# Altium PCB PCB_RegThermique.PcbDoc
Units mm, origin at the board's own origin, x right, y up, seen from the top; angles counter-clockwise.
Board outline 154.95 x 94.96 mm, 2 copper layers (Top Layer, Bottom Layer), stack 1.586 mm thick; 119 components, 73 nets, 345 pads, 146 vias.
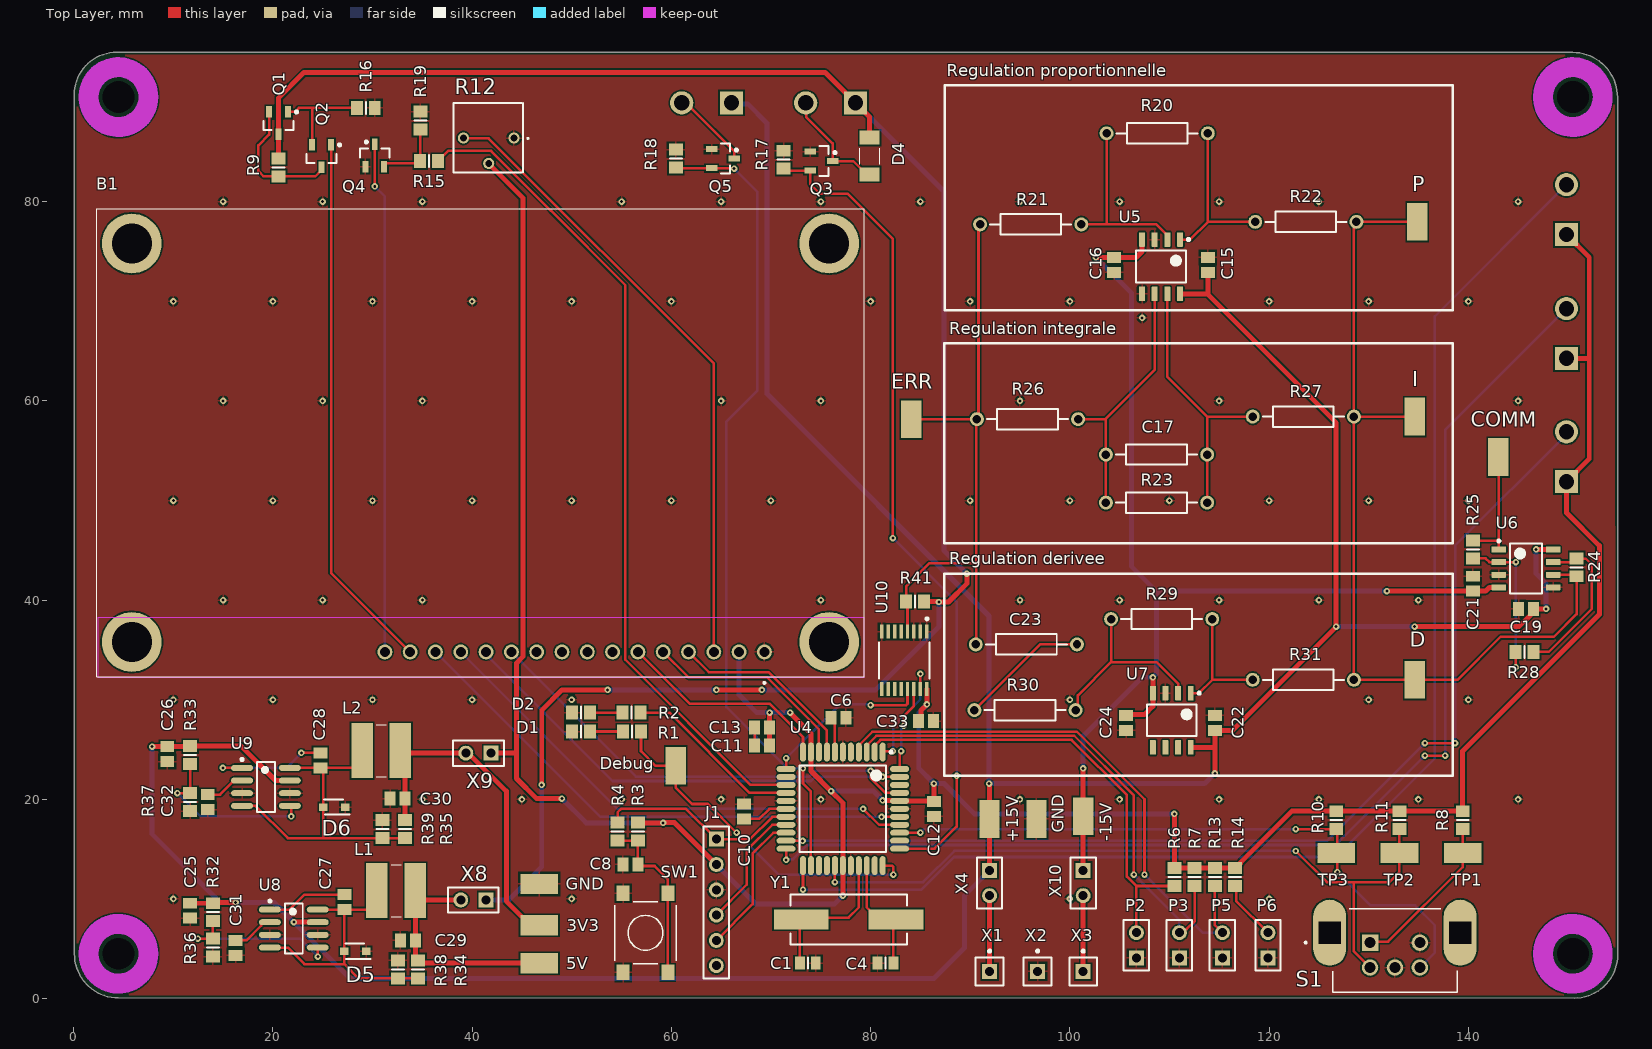
[diagram p0: Top Layer view]
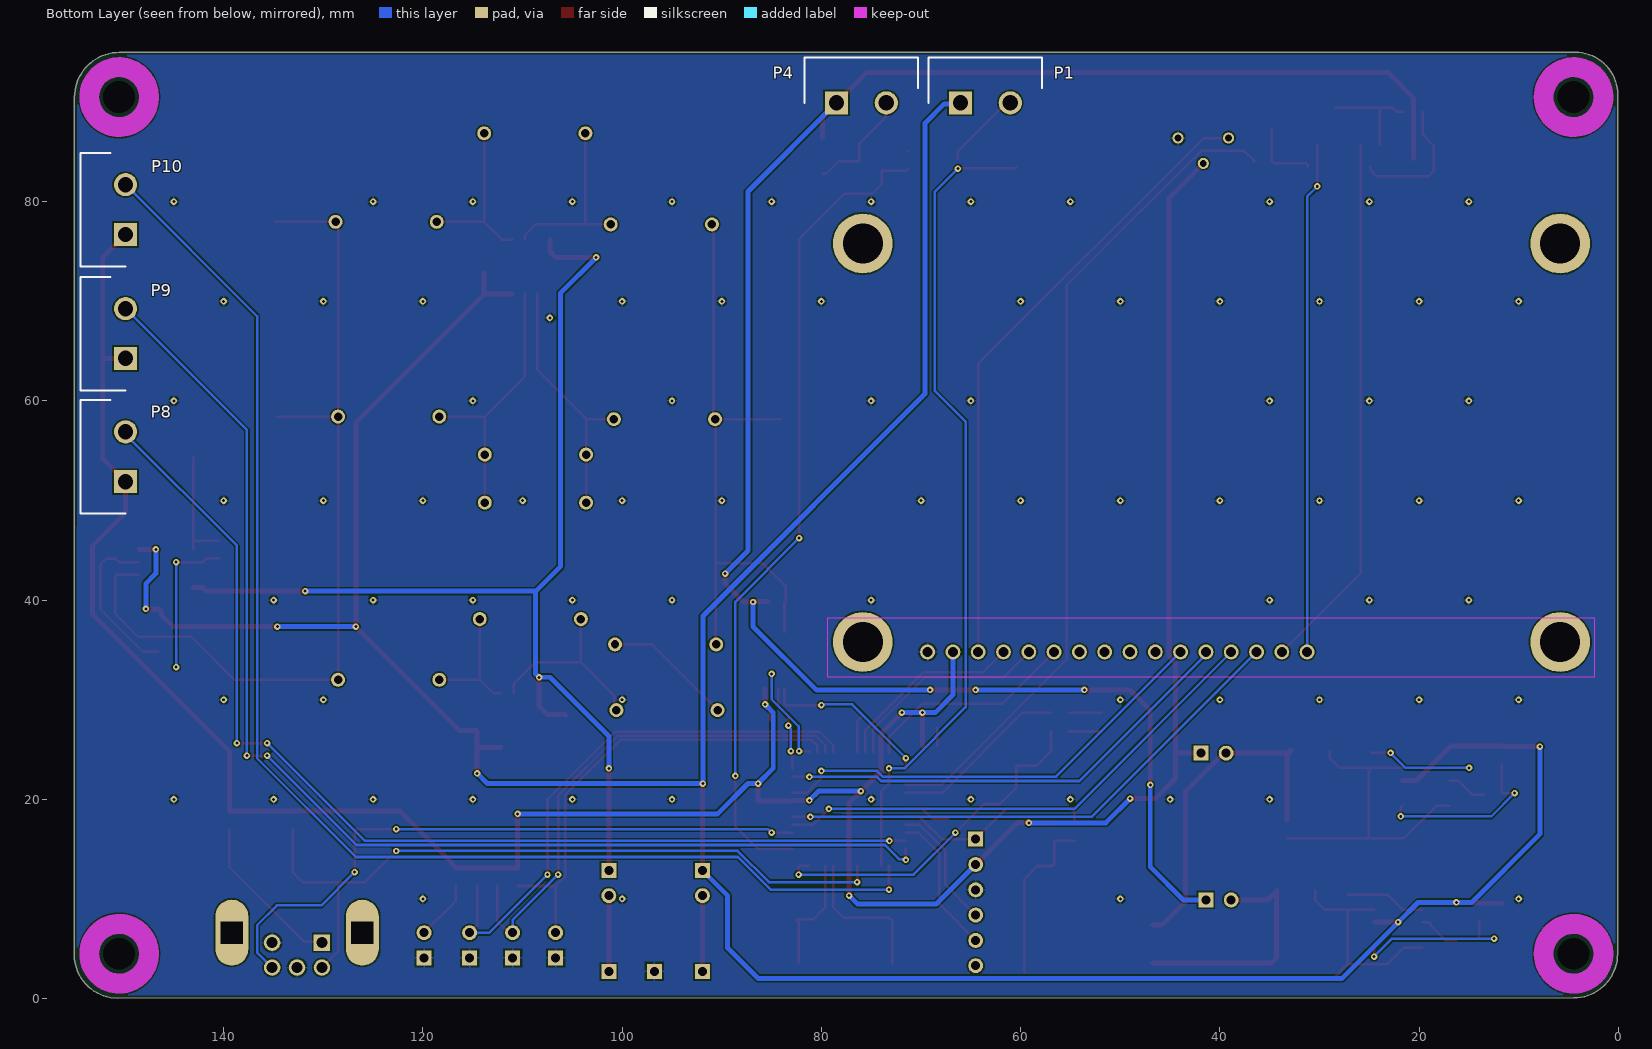
[diagram p1: Bottom Layer view, seen from below]

## Layer stack, top to bottom
Top Solder: solder mask 0.0102, Solder Resist, Dk 3.5
Top Layer: signal copper 0.018
Dielectric1: core 1.55, FR-4, Dk 4.8
Bottom Layer: signal copper 0.018
Bottom Solder: solder mask 0.0102, Solder Resist, Dk 3.5

## Board outline
0.072,4.497 0.056,90.729 cw(c4.332,90.729) 4.332,95.004 150.482,94.984 cw(c150.482,90.482) 154.984,90.482 155.011,4.423 cw(c150.633,4.423) 150.633,0.045 4.498,0.072 cw(c4.498,4.497)

## Design rules (kind name [scope] priority, off if disabled: settings)
BoardOutlineClearance [All] p1: gap=0.25 ignorepadtopadclearanceinfootprint=FALSE except(0: Arc-SplitContinuation Track-SplitContinuation SMDPad-SplitContinuation THPad-SplitContinuation Via-SplitContinuation Fill-SplitContinuation Poly-SplitContinuation Region-SplitContinuation Text-SplitContinuation)
Clearance Clearance-xPP-xTP-xTT [All] p1: gap=0.151 ignorepadtopadclearanceinfootprint=TRUE
ComponentClearance [All] p1: gap=0.25 collisioncheckmode=3 verticalgap=0.25 showdistances=FALSE
DiffPairsRouting [All] p1: maxlimit=0.25 minlimit=0.25 mostfreqgap=0.25 toplayer_minwidth=0.381 toplayer_maxwidth=0.381 toplayer_prefwidth=0.381 bottomlayer_minwidth=0.381 bottomlayer_maxwidth=0.381 bottomlayer_prefwidth=0.381 maxuncoupledlength=12.5
Height [All] p1: minheight=0 maxheight=25 prefheight=12.5
HoleSize HoleSize-PTH [All] p1: absolutevalues=TRUE maxlimit=10 minlimit=0.25 maxpercent=80.000 minpercent=20.000
HoleToHoleClearance [All] p1: gap=0.35 allowstackedmicrovias=TRUE
MinimumAnnularRing "Minimum IAR  >0.45mm" [((ObjectKind = 'Pad') OR (ObjectKind = 'Via')) And (Layer = 'MultiLayer') And (HoleDiameter > AsMM(0.45))] p1: minimumring=0.175 // minimum inner annular ring for pads > 0.45mm finished hole size
MinimumAnnularRing "Minimum IAR <=0.45mm" [((ObjectKind = 'Pad') OR (ObjectKind = 'Via')) And (Layer = 'MultiLayer') And (HoleDiameter <= AsMM(0.45))] p2: minimumring=0.175 // minimum inner annular ring for pads <= 0.45mm finished hole size
MinimumSolderMaskSliver [All] p1: minsoldermaskwidth=0.08
PasteMaskExpansion [All] p1: expansion=-0.025
PlaneClearance PlaneClearance-IPI [All] p1: clearance=0.25
PlaneConnect [All] p1: planeconnectstyle=Relief reliefexpansion=0.175 reliefentries=4 reliefconductorwidth=0.2 reliefairgap=0.2
PolygonConnect PolygonConnect-xTW [All] p1: connectstyle=Relief reliefconductorwidth=0.2 reliefentries=4 polygonreliefangle="90 Angle" airgapwidth=0.2
RoutingCorners [All] p1: cornerstyle=45-Degree minsetback=2.5 maxsetback=5
RoutingVias RoutingViasES [All] p1: holewidth=0.3 width=0.65 viastyle="Through Hole" minholewidth=0.25 minwidth=0.61 maxholewidth=0.45 maxwidth=0.8 // finishet hole size <= 0.45mm
SilkToSilkClearance [All] p1: silktosilkclearance=0.2
SilkToSolderMaskClearance SilkscreenOverComponentPads [IsPad] p1: minsilkscreentomaskgap=0.2 clearancetoexposedcopper=TRUE
SolderMaskExpansion [All] p1: expansion=0 istentingtop=FALSE
UnRoutedNet [All] p1: checkbadconnections=TRUE
Width Width-xTW [InNetClass('POWER')] p1: maxlimit=1.5 minlimit=0.5 preferedwidth=0.5 minimp=50.000000 maximp=50.000000 favimp=50.000000
17 further rules are at their usual default settings.

## Classes and differential pairs
component class uC_HMI: B1 C1 C4 C6 C8 C10 C11 C12 C13 D1 D2 D4 Debug1 GND1 J1 P1 P2 P3 P4 P5 P6 P8 P9 P10 Q1 Q2 Q3 Q4 Q5 R1 R2 R3 R4 R6 R7 R8 R9 R10 R11 R12 R13 R14 R15 R16 R17 R18 R19 S1 SW1 TP1 TP2 TP3 U4 Y1
component class Regulation_PID: C15 C16 C17 C19 C21 C22 C23 C24 R20 R21 R22 R23 R24 R25 R26 R27 R28 R29 R30 R31 "REG D1" "REG I1" "REG P1" REG_COMM1 REG_ERR1 U5 U6 U7
component class Alimentation: 3V3 5V +15V -15V C25 C26 C27 C28 C29 C30 C31 C32 C33 D5 D6 GND1 L1 L2 R32 R33 R34 R35 R36 R37 R38 R39 R41 U8 U9 U10 X1 X2 X3 X4 X8 X9 X10

## Components (designator, comment, footprint, x,y, rotation, side; value= is the part's Value field where it differs from the comment)
3V3 "REGP" KSTN-5019_V 46.736,7.366 r180 top
5V "REGP" KSTN-5019_V 46.736,3.556 r0 top
+15V "REGP" KSTN-5019_V 91.948,18.034 r270 top
-15V "REGP" KSTN-5019_V 101.346,18.3 r270 top
B1 "NHD-0420AZ-FSW-GBW-33V3" NHD0420AZFSWGBW33V3 69.342,34.798 r180 top
C1 "22pF, 10V" 6-0805_L 73.698,3.556 r180 top value=22pF
C4 "22pF, 10V" 6-0805_L 81.496,3.556 r0 top value=22pF
C6 "Cap" C0805 76.782,28.194 r180 top value=100pF
C8 "100nF, 50V" C0805 55.88,13.462 r180 top
C10 "Cap" C0805 67.31,18.784 r270 top value=0.1uF
C11 "Cap" C0805 69.1,25.4 r180 top value=0.1uF
C12 "Cap" C0805 86.36,19.05 r270 top value=0.1uF
C13 "Cap" C0805 69.1,27.236 r180 top value=0.1uF
C15 "Cap" C0805 113.854,73.66 r270 top value=100nF
C16 "Cap" C0805 104.456,73.648 r90 top value=100nF
C17 "Cap" AXIAL-0.4 108.712,54.61 r180 top value=100pF
C19 "Cap" C0805 145.796,39.116 r0 top value=100nF
C21 "Cap" C0805 140.462,41.646 r270 top value=100nF
C22 "Cap" C0805 114.554,27.686 r270 top value=100nF
C23 "Cap" AXIAL-0.4 95.642,35.56 r180 top value=100pF
C24 "Cap" C0805 105.664,27.686 r90 top value=100nF
C25 "Cap Pol1" C0805 11.684,8.821 r270 top value=47uF
C26 "Cap Pol1" C0805 9.398,24.545 r270 top value=47uF
C27 "Cap" C0805 27.178,9.686 r270 top value=0.1uF
C28 "Cap" C0805 24.769,23.91 r270 top value=0.1uF
C29 "Cap Pol1" C0805 33.556,5.842 r180 top value=33uF
C30 "Cap Pol1" C0805 32.524,20.066 r180 top value=33uF
C31 "Cap" C0805 16.256,5.092 r270 top value=0.1uF
C32 "Cap" C0805 13.462,19.731 r270 top value=0.1uF
C33 "Cap" C0805 85.56,27.845 r180 top value=0.047u
COMM "REGP" KSTN-5019_V 143.002,54.356 r90 top (schematic designator REG_COMM1)
D "REGP" KSTN-5019_V 134.62,32.004 r90 top (schematic designator "REG D1")
D1 "Super Red, 1.9 V" 6-0805_N 50.938,26.812 r0 top
D2 "Bright Green, 2 V" 6-0805_N 50.938,28.702 r0 top
D4 "1N4007" JAN1N4108CUR1 79.906,84.582 r90 top
D5 "50SQ100" SODFL2513X70N 28.278,4.745 r180 top
D6 "50SQ100" SODFL2513X70N 26.162,19.223 r180 top
Debug "LedDebugg" KSTN-5019_V 60.452,23.368 r270 top (schematic designator Debug1)
ERR "REGP" KSTN-5019_V 84.074,58.166 r90 top (schematic designator REG_ERR1)
GND "REGP" KSTN-5019_V 96.645,18.034 r90 top
GND "PEC12" KSTN-5019_V 46.736,11.511 r0 top
I "REGP" KSTN-5019_V 134.62,58.42 r90 top (schematic designator "REG I1")
J1 "61300611121" HDR1X6 64.516,16.002 r270 top
L1 "Inductor" SDE0604A101K 32.365,10.841 r0 top value=220uH
L2 "Inductor" SDE0604A101K 30.881,24.892 r0 top value=220uH
P "REGP" KSTN-5019_V 134.874,77.978 r90 top (schematic designator "REG P1")
P1 "R_Dissipator" RHDRRA2W95P0X500_1X2_1120X900X1280P 66.04,89.916 r180 bottom
P2 "Alim 0-30 IN" HDR1X2 106.68,4.076 r90 top
P3 "Alim 0-30 IN" HDR1X2 110.998,4.076 r90 top
P4 "FAN_Control" RHDRRA2W95P0X500_1X2_1120X900X1280P 78.486,89.916 r180 bottom
P5 "Alim 0-30 IN" HDR1X2 115.316,4.076 r90 top
P6 "Alim 0-30 IN" HDR1X2 119.888,4.076 r90 top
P8 "R_Dissipator" RHDRRA2W95P0X500_1X2_1120X900X1280P 149.86,51.896 r90 bottom
P9 "R_Dissipator" RHDRRA2W95P0X500_1X2_1120X900X1280P 149.86,64.262 r90 bottom
P10 "R_Dissipator" RHDRRA2W95P0X500_1X2_1120X900X1280P 149.86,76.708 r90 bottom
Q1 "PNP" SOT-23B_N 20.574,87.884 r270 top
Q2 "PNP" SOT-23B_N 24.892,84.582 r270 top
Q3 "MOSFET-N" SOT23_N 75.075,84.074 r0 top
Q4 "MOSFET-N" SOT23_N 30.226,84.647 r90 top
Q5 "MOSFET-N" SOT23_N 65.169,84.328 r0 top
R1 "270R" 6-0805_N 56.054,26.812 r0 top
R2 "270R" 6-0805_N 56.018,28.702 r0 top
R3 "10k" 6-0805_N 56.642,16.764 r90 top
R4 "1k" 6-0805_N 54.61,16.764 r90 top
R6 "Res2" 6-0805_N 110.49,12.204 r90 top value=10K
R7 "Res2" 6-0805_N 112.522,12.204 r90 top value=10K
R8 "10k" 6-0805_N 139.446,17.908 r90 top
R9 "Res2" 6-0805_N 20.574,83.45 r270 top value=33
R10 "10k" 6-0805_N 126.746,17.908 r90 top
R11 "10k" 6-0805_N 133.096,17.908 r90 top
R12 "RPot" 3362P_1 41.664,89.916 r180 top value=10k
R13 "Res2" 6-0805_N 114.554,12.204 r90 top value=10K
R14 "Res2" 6-0805_N 116.586,12.204 r90 top value=10K
R15 "Res2" 6-0805_N 35.676,84.074 r180 top value=200
R16 "Res2" 6-0805_N 29.326,89.408 r0 top value=1k8
R17 "Res2" 6-0805_N 71.27,84.212 r270 top value=10k
R18 "Res2" 6-0805_N 60.452,84.328 r270 top value=10k
R19 "Res2" 6-0805_N 34.798,88.138 r270 top value=100k
R20 "Res2" AXIAL-0.4 108.774,86.868 r0 top value=-
R21 "Res2" AXIAL-0.4 96.074,77.724 r0 top value=-
R22 "10k" AXIAL-0.4 123.698,77.978 r0 top value=1K
R23 "Res2" AXIAL-0.4 108.712,49.784 r0 top value=1K
R24 "Res2" 6-0805_N 150.876,43.296 r90 top value=100k
R25 "Res2" 6-0805_N 140.462,45.085 r90 top value=1K
R26 "Res2" AXIAL-0.4 95.758,58.166 r0 top value=1K
R27 "10K" AXIAL-0.4 123.444,58.42 r0 top value=1K
R28 "Res2" 6-0805_N 145.658,34.798 r180 top value=1K
R29 "Res2" AXIAL-0.4 109.22,38.1 r0 top value=1K
R30 "Res2" AXIAL-0.4 95.504,28.956 r0 top value=1K
R31 "10k" AXIAL-0.4 123.444,32.004 r0 top value=1K
R32 "Res2" 6-0805_N 13.97,8.671 r90 top value=1K
R33 "Res2" 6-0805_N 11.684,24.441 r90 top value=1K
R34 "Res2" 6-0805_N 34.584,2.932 r90 top value=47k
R35 "Res2" 6-0805_N 33.274,17.018 r90 top value=24k
R36 "Res2" 6-0805_N 13.97,5.115 r90 top value=1K
R37 "Res2" 6-0805_N 11.684,19.731 r90 top value=1K
R38 "Res2" 6-0805_N 32.552,2.932 r270 top value=15k
R39 "Res2" 6-0805_N 30.988,17.018 r270 top value=15k
R41 "Res2" 6-0805_N 84.466,39.878 r0 top value=10k
S1 "PEC12R-2220F-S0024" XDCR_PEC12R-2220F-S0024 132.642,3.116 r0 top
SW1 "430182043816" 430182043816 57.404,6.604 r90 top
TP1 "REGP" KSTN-5019_V 139.446,14.606 r180 top
TP2 "REGP" KSTN-5019_V 133.096,14.606 r180 top
TP3 "REGP" KSTN-5019_V 126.746,14.606 r180 top
U4 "PIC32MX250F128D-I/PT" MCHP-TQFP-PT44_M 77.216,19.05 r270 top
U5 "TL052ACD" D0008A_N 109.155,73.475 r270 top
U6 "TL052ACD" D0008A_N 145.796,43.18 r0 top
U7 "TL052ACD" D0008A_N 110.236,27.94 r270 top
U8 "MAX5033AUSA" S8-5_N 22.098,7.031 r0 top
U9 "MAX5033AUSA" S8-5_N 19.304,21.255 r0 top
U10 "MAX7315AUE+T" FP-U16-2-MFG 83.382,33.955 r270 top
X1 "POWER" PIN1 91.948,2.713 r0 top
X2 "GROUND" PIN1 96.774,2.725 r0 top
X3 "-POWER" PIN1 101.346,2.713 r0 top
X4 "Jumper" HDR1X2 91.948,12.873 r270 top
X8 "Jumper" HDR1X2 41.402,9.906 r180 top
X9 "Jumper" HDR1X2 41.91,24.638 r180 top
X10 "Jumper" HDR1X2 101.346,12.873 r270 top
Y1 "8MHz, 12p" FOX-FOXSDLF160-20_V 77.8,7.95 r0 top value="8M, 12p"

## Footprints (in the part's own frame and the unit in brackets; to place one, negate y for a bottom-side part, rotate by r counter-clockwise, add the part's x,y. Pads: shape width x height; smd on the part's side, far side on the other; paste and mask are expansions set on the pad)
6-0805_L [mm] "Chip Resistor, Body 2.0x1.2mm, IPC High Density"
  rect 1x1.3 smd: 1(-0.8,0) 2(0.8,0)
  silkscreen extent 0,-0.55 0,0.55, body extent -1.07,-0.7 1.07,0.7, height 0.7
6-0805_N [mm] "Chip Resistor, Body 2.0x1.2mm, IPC Medium Density"
  rect 1.2x1.4 smd: 1(-0.9,0) 2(0.9,0)
  silkscreen extent 0,-0.6 0,0.6, body extent -1.07,-0.7 1.07,0.7, height 0.7
3362P_1 [mm]
  round 1.12 hole 0.69: 1(-2.54,3.53) 2(0,6.07) 3(2.54,3.53)
  silkscreen extent -3.99,0 3.56,6.99
430182043816 [mm] "6*6mm vertical type, SMD, height 4.3mm, black actuator, 160gf, T&R"
  rect 1.55x1.3 smd: 1(-3.975,2.25) 2(-3.975,-2.25) 3(3.975,2.25) 4(3.975,-2.25)
  silkscreen extent -3.1,-3.1 3.1,3.1, body extent -4.5,-3.1 4.5,3.1, height 4.29
AXIAL-0.4 [mm] "Axial Device, Thru-Hole; 2 Leads; 0.4 in Pin Spacing"
  round 1.4 hole 0.85: 1(-5.08,0) 2(5.08,0)
  silkscreen extent -4.06,-1.02 4.06,1.02
C0805 [mm] "Chip Capacitor, Body 2.0x1.3mm, IPC High Density"
  rect 1.1x1.4 smd: 1(-0.75,0) 2(0.75,0)
  body extent -1.1,-0.72 1.1,0.72, height 1.4
D0008A_N [mm] "SOIC, 8-Leads, Body 5x4mm, Pitch 1.27mm, IPC Medium Density"
  rrect17% 1.45x0.6 smd: 1(-2.725,1.905) 2(-2.725,0.635) 3(-2.725,-0.635) 4(-2.725,-1.905) 5(2.725,-1.905) 6(2.725,-0.635) 7(2.725,0.635) 8(2.725,1.905)
  silkscreen extent -2.85,-2.5 1.6,2.88, body extent -3,-2.45 3,2.45, height 1.63
FOX-FOXSDLF160-20_V [mm] "SMD, 2-Leads, Body 5x11.7mm, Height 4.5mm"
  rect 5.5x2 smd: 1(-4.75,0) 2(4.75,0)
  silkscreen extent -5.85,-2.5 5.85,2.5, body extent -5.85,-2.5 5.85,2.5, height 4.5
FP-U16-2-MFG [mm]
  rect 1.4x0.35 smd paste+0 mask+0: 1(-2.875,2.275) 2(-2.875,1.625) 3(-2.875,0.975) 4(-2.875,0.325) 5(-2.875,-0.325) 6(-2.875,-0.975) 7(-2.875,-1.625) 8(-2.875,-2.275) 9(2.875,-2.275) 10(2.875,-1.625) 11(2.875,-0.975) 12(2.875,-0.325) 13(2.875,0.325) 14(2.875,0.975) 15(2.875,1.625) 16(2.875,2.275)
  silkscreen extent -4.3,-2.55 1.8,2.55, body extent -3.2,-2.5 3.2,2.5, height 1.1
HDR1X2 [mm] "Connector; Header; 2 Position"
  rect 1.5x1.5 hole 0.9: 1(0,0)
  round 1.5 hole 0.9: 2(2.54,0)
  silkscreen extent -1.27,-1.27 3.81,1.27
HDR1X6 [mm] "Connector; Header; 6 Position"
  rect 1.5x1.5 hole 0.9: 1(0,0)
  round 1.5 hole 0.9: 2(2.54,0) 3(5.08,0) 4(7.62,0) 5(10.16,0) 6(12.7,0)
  silkscreen extent -1.27,-1.27 13.97,1.27
JAN1N4108CUR1 [mm]
  rect 1.4x2.03 smd: 1(-1.84,0) 2(1.84,0)
  silkscreen extent -0.8,-1 0.8,1
KSTN-5019_V [mm] "Test Point, 1-Leads, Body 3.81x2.03mm"
  rect 3.8x2.03 smd: 1(0,0)
  body extent -1.9,-1.01 1.9,1.02, height 2.29
MCHP-TQFP-PT44_M [mm] "QFN, 44-Leads, Body 10x10mm, Pitch 0.8mm, IPC Low Density"
  oval 1.9x0.6 smd: 1(-5.7,4) 2(-5.7,3.2) 3(-5.7,2.4) 4(-5.7,1.6) 5(-5.7,0.8) 6(-5.7,0) 7(-5.7,-0.8) 8(-5.7,-1.6) 9(-5.7,-2.4) 10(-5.7,-3.2) 11(-5.7,-4) 23(5.7,-4) 24(5.7,-3.2) 25(5.7,-2.4) 26(5.7,-1.6) 27(5.7,-0.8) 28(5.7,0) 29(5.7,0.8) 30(5.7,1.6) 31(5.7,2.4) 32(5.7,3.2) 33(5.7,4)
  oval 0.6x1.9 smd: 12(-4,-5.7) 13(-3.2,-5.7) 14(-2.4,-5.7) 15(-1.6,-5.7) 16(-0.8,-5.7) 17(0,-5.7) 18(0.8,-5.7) 19(1.6,-5.7) 20(2.4,-5.7) 21(3.2,-5.7) 22(4,-5.7) 34(4,5.7) 35(3.2,5.7) 36(2.4,5.7) 37(1.6,5.7) 38(0.8,5.7) 39(0,5.7) 40(-0.8,5.7) 41(-1.6,5.7) 42(-2.4,5.7) 43(-3.2,5.7) 44(-4,5.7)
  silkscreen extent -5.82,-4.35 4.35,4.97, body extent -5,-5 5,5, height 1.2
NHD0420AZFSWGBW33V3 [mm]
  round 1.5 hole 1: 1(0,0) 2(2.54,0) 3(5.08,0) 4(7.62,0) 5(10.16,0) 6(12.7,0) 7(15.24,0) 8(17.78,0) 9(20.32,0) 10(22.86,0) 11(25.4,0) 12(27.94,0) 13(30.48,0) 14(33.02,0) 15(35.56,0) 16(38.1,0)
  round 6 hole 4: MH1(-6.5,-1) MH2(-6.5,-41) MH3(63.5,-41) MH4(63.5,-1)
  Keep-Out Layer region: -10.033,-3.429 66.929,-3.429 66.929,2.54 -10.033,2.54
  silkscreen extent -10,-44.5 67,3.2, body extent -10,-3.38 10,3.38, height 5.8
PIN1 [mm] "Generic Antenna; 1 Lead"
  rect 1.5x1.5 hole 0.9: 1(0,0)
  silkscreen extent -1.4,-1.4 1.4,2.17
RHDRRA2W95P0X500_1X2_1120X900X1280P [mm]
  rect 2.325x2.325 / inner round 2.325 / far side rect 2.325x2.325 hole 1.55: 1(0,0)
  round 2.325 hole 1.55: 2(5,0)
  silkscreen extent -3.2,0 8.2,4.54
S8-5_N [mm] "SOIC, 8-Leads, Body 4.9x3.9mm, Pitch 1.27mm, IPC Medium Density"
  oval 2.2x0.6 smd: 1(-2.4,1.905) 2(-2.4,0.635) 3(-2.4,-0.635) 4(-2.4,-1.905) 5(2.4,-1.905) 6(2.4,-0.635) 7(2.4,0.635) 8(2.4,1.905)
  silkscreen extent -2.52,-2.5 0.9,2.88, body extent -2,-2.5 2,2.5, height 1.75
SDE0604A101K [mm]
  rect 2.15x5.5 smd: 1(-1.925,0) 2(1.925,0)
  silkscreen extent -0.5,-2.6 0.5,2.6
SODFL2513X70N [mm]
  rect 0.84x0.74 smd: 1(-1.1,0) 2(1.1,0)
  silkscreen extent -1.52,-0.76 1.01,0.76
SOT23_N [mm] "SOT23, 3-Leads, Body 2.9x1.3mm, Pitch 0.95mm, Lead Span 2.3mm - Reverse Pinning, IPC Medium Density"
  rect 1.15x0.6 smd: 1(1.125,0) 2(-1.125,-0.95) 3(-1.125,0.95)
  silkscreen extent -0.2,-1.5 1.48,1.5, body extent -0.7,-1.5 0.7,1.5, height 1.1
SOT-23B_N [mm] "SOT23, 3-Leads, Body 2.9x1.3mm, Pitch 0.95mm, Lead Span 2.4mm, IPC Medium Density"
  rect 1.15x0.6 smd: 1(-1.125,0.95) 2(-1.125,-0.95) 3(1.125,0)
  silkscreen extent -1.25,-1.5 0.7,1.93, body extent -0.7,-1.5 0.7,1.5, height 1.14
XDCR_PEC12R-2220F-S0024 [mm]
  rect 1.65x1.65 hole 1.1: 1(-2.5,2.5)
  round 1.65 hole 1.1: 2(2.5,2.5) A(-2.5,0) B(2.5,0) C(0,0)
  oval 3.316x6.632 hole 2.2 square: S1(-6.55,3.5) S2(6.55,3.5)
  silkscreen extent -9.06,-2.5 6.26,5.9, body extent -6.41,-20 6.41,2.4, height 16.7

## Part data
3V3 5V +15V -15V COMM D Debug ERR GND GND I P TP1 TP2 TP3: library part CMP-1672-00008-1, "Test Point, 1 Position SMD, RoHS, Tape and Reel", Package Quantity=1000, ComponentLink1Description="Manufacturer URL", ComponentLink1URL=http://www.keyelco.com/, ComponentLink2Description=Datasheet, ComponentLink2URL=http://www.keyelco.com/product-pdf.cfm?p=1357, Contact Plating=Silver, DatasheetVersion=03/2014, Mount="Surface Mount", Mounting Technology="Surface Mount", PackageDescription="1-Pin Surface Mount Device, Body 3.81 x 2.03 mm", PackageReference=5019, Packaging="Tape and Reel", Pins=1, RoHSCompliant=True
B1: "LCD Character Display Modules & Accessories STN- GRAY Transfl 77.5 x 47.0", Manufacturer_Name="Newhaven Display", Mouser Part Number=763-0420AZFSWGBW33V3, Datasheet Link=http://www.newhavendisplay.com/specs/NHD-0420AZ-FSW-GBW-33V3.pdf, Geometry.Height=14.5mm, Manufacturer_Part_Number=NHD-0420AZ-FSW-GBW-33V3, Mouser Price/Stock=https://www.mouser.co.uk/ProductDetail/Newhaven-Display/NHD-0420AZ-FSW-GBW-33V3?qs=G49gCGQm93jUf0i9XnwMsw%3D%3D
C1 C4: library part CMP-1036-01211-1, "CAP 22pF 10V ±10% 0805 (2012 Metric) Thickness 0.75mm SMD", Case-EIA=0805, Case-Metric=2012, Rated Voltage="10 V", Tolerance=Â±10%, Max Thickness="0.75 mm", Technology=SMT
C6 C10 C11 C12 C13 C15 C16 C17 C19 C21 C22 C23 C24 C27 C28 C31 C32 C33: "Capacitor", LatestRevisionDate=17-Jul-2002, LatestRevisionNote="Re-released for DXP Platform.", PackageDescription="Radial Cap, Thru-Hole; 2 Leads; 0.3 in Pin Spacing", PackageReference=RAD-0.3, Published=8-Jun-2000, Publisher="Altium Limited"
C8: library part 885012207098, "WCAP-CSGP General Purpose Ceramic Capacitors, size 0805, 100nF, +/-10%, 50VDC", Capacitance=100nF, Capacitance Tolerance=+/-10%, Isolation Resistance=>=5GOhm, Operating Temperature="-55 to +125degC", Rated Voltage=50VDC, Supplier Part Number 1=732-8080-1-ND, Ceramic Type=X7R, ComponentLink1Description=Manufacturer, ComponentLink1URL=http://www.we-online.de, ComponentLink2Description=Datasheet, ComponentLink2URL=https://katalog.we-online.com/pbs/datasheet/885012207098.pdf, Dissipation Factor=#NAME?, Height="0.8mm +/-0.10mm", Mounting Technology=SMD, Packaging="Tape and Reel", Part Number=885012207098, Published Date="August 2019", Publisher="Wurth Elektronik", Size=0805, Supplier 1=Digi-Key, Supplier 2=Distrelec, Supplier Part Number 2=30067953, Technical Reference=X7R0805104K050DFCT10000
C25 C26 C29 C30: "Polarized Capacitor (Radial)", LatestRevisionDate=17-Jul-2002, LatestRevisionNote="Re-released for DXP Platform.", PackageDescription="Polarized Capacitor (Radial); 2 Leads", PackageReference=RB7.6-15, Published=8-Jun-2000, Publisher="Altium Limited"
D1: library part 150080SS75000, "SMT Mono-color Chip LED Waterclear WL-SMCW, size 0805, Super Red, 1.9 V, 140 deg, 60 mcd", Emitting Color="Super Red", Forward Voltage="1.9 V", Operating Temperature="-40 to 85 degC", Supplier Part Number 1=732-4985-1-ND, Chip Technology=AlInGaP, ComponentLink1Description=Manufacturer, ComponentLink1URL=http://www.we-online.de, ComponentLink2Description=Datasheet, ComponentLink2URL=https://katalog.we-online.de/led/datasheet/150080SS75000.pdf, Dominant Wavelength="630 nm", Luminous Intensity="60 mcd", Mounting Technology=SMT, Packaging="Tape and Reel", Part Number=150080SS75000, Peak Wavelength="645 nm", Published Date="November 2018", Publisher="Wurth Elektronik", Size=0805, Supplier 1=Digi-Key, Supplier 2=Distrelec, Supplier Part Number 2=30008875, Viewing Angle="140 deg"
D2: library part 150080VS75000, "SMT Mono-color Chip LED Waterclear WL-SMCW, size 0805, Bright Green, 2 V, 140 deg, 40 mcd", Emitting Color="Bright Green", Forward Voltage="2 V", Operating Temperature="-40 to 85 degC", Supplier Part Number 1=732-4986-1-ND, Chip Technology=AlInGaP, ComponentLink1Description=Manufacturer, ComponentLink1URL=http://www.we-online.de, ComponentLink2Description=Datasheet, ComponentLink2URL=https://katalog.we-online.de/led/datasheet/150080VS75000.pdf, Dominant Wavelength="570 nm", Luminous Intensity="40 mcd", Mounting Technology=SMT, Packaging="Tape and Reel", Part Number=150080VS75000, Peak Wavelength="572 nm", Published Date="November 2018", Publisher="Wurth Elektronik", Size=0805, Supplier 1=Digi-Key, Supplier 2=Distrelec, Supplier Part Number 2=30008876, Viewing Angle="140 deg"
D4: library part Diode, "Default Diode", Code_JEDEC=DO-214-AB, LatestRevisionDate=17-Jul-2002, LatestRevisionNote="Re-released for DXP Platform.", PackageDescription="DO-214-AB/SMC; 2 C-Bend Leads; Body 7.9 x 5.9 mm, inc. leads (LxW)", PackageReference=SMC, PackageVersion=Sep-1996, Published=8-Jun-2000, Publisher="Altium Limited"
D5 D6: library part "D Schottky", "Schottky Diode", Code_JEDEC=DO-214-AA, LatestRevisionDate=17-Jul-2002, LatestRevisionNote="Re-released for DXP Platform.", PackageDescription="DO-214-AA/SMB; 2 C-Bend Leads; Body 5.3 x 3.6 mm, inc. leads (LxW)", PackageReference=SMB, Published=8-Jun-2000, Publisher="Altium Limited"
J1: "WR-PHD Pin Header, THT, pitch 2.54mm, Single Row, Vertical, 6pin", Contact Resistance=20mOhm, Operating Temperature="-40 to +105degC", Rated Current=3A, Supplier Part Number 1=732-5319-ND, Withstanding Voltage=500VAC, Working Voltage=250VAC, ComponentLink1Description=Manufacturer, ComponentLink1URL=http://www.we-online.de, ComponentLink2Description=Datasheet, ComponentLink2URL=https://katalog.we-online.de/em/datasheet/6130xx11121.pdf, Gender=Male, Mounting Technology=THT, Orientation=Vertical, Packaging=Bag, Part Number=61300611121, Pin Number=6, Pitch=2.54mm, Published Date="June 2019", Publisher="Wurth Elektronik", Row Number=Single, Supplier 1=Digi-Key, Supplier 2=Distrelec, Supplier Part Number 2=30024526
P1 P2 P3 P4 P5 P6 P8 P9 P10: library part "Header 2", "Header, 2-Pin", LatestRevisionDate=17-Jul-2002, LatestRevisionNote="Re-released for DXP Platform.", Publisher="Altium Limited"
Q1 Q2: "PNP Bipolar Transistor", LatestRevisionDate=29-May-2009, LatestRevisionNote="IPC-7351 Footprint Added.", PackageDescription="3-Pin SOT-23 Package 0.95 mm Pitch, 2.4 mm Lead Span", PackageReference=SOT-23B, PackageVersion=Aug-1999, Published=8-Jun-2000, Publisher="Altium Limited"
Q3 Q4 Q5: "N-Channel MOSFET", LatestRevisionDate=17-Jul-2002, LatestRevisionNote="Re-released for DXP Platform.", PackageDescription="TO, Flat Index; 3 In-Line, Axial Leads; Body Dia. 4.6mm; Lead Dia. 0.5 mm (max)", PackageReference=E3, PackageVersion=1995/1996, Published=8-Jun-2000, Publisher="Altium Limited"
R1 R2: library part CMP-2001-00528-1, Manufacturer=Panasonic, Part Number=ERJ6ENF2703V
R3: library part CMP-2001-04376-1, Manufacturer=Panasonic, Part Number=ERJ-6ENF1002V
R4: library part CMP-1013-00510-2, Manufacturer="Vishay Dale", Part Number=CRCW08051K00FKEA
R6 R7 R9 R13 R14 R15 R16 R17 R18 R19 R20 R21 R23 R24 R25 R26 R28 R29 R30 R32 R33 R34 R35 R36 R37 R38 R39 R41: "Resistor", LatestRevisionDate=17-Jul-2002, LatestRevisionNote="Re-released for DXP Platform.", PackageDescription="Axial Device, Thru-Hole; 2 Leads; 0.4 in Pin Spacing", PackageReference=AXIAL-0.4, Published=8-Jun-2000, Publisher="Altium Limited"
R8 R10 R11: library part Resistor, Supplier="Stock ES"
R12: "Potentiometer", LatestRevisionDate=17-Jul-2002, LatestRevisionNote="Re-released for DXP Platform.", PackageDescription="Variable Resistor, Thru-Hole; 3 Leads", PackageReference=VR5, Published=8-Jun-2000, Publisher="Altium Limited", Set Position=0.5, Sim Note="Enter the Resistance value and the set point into parameter fields."
R22 R27 R31: library part Res2, "Resistor", LatestRevisionDate=17-Jul-2002, LatestRevisionNote="Re-released for DXP Platform.", PackageDescription="Axial Device, Thru-Hole; 2 Leads; 0.4 in Pin Spacing", PackageReference=AXIAL-0.4, Published=8-Jun-2000, Publisher="Altium Limited"
S1: "Rotary Encoder Mechanical 24 Quadrature (Incremental) Right Angle", Package=None, Check_prices=https://www.snapeda.com/parts/PEC12R-2220F-S0024/Bourns/view-part/?ref=eda, MF=Bourns, MP=PEC12R-2220F-S0024, Purchase-URL=https://pricing.snapeda.com/search/part/PEC12R-2220F-S0024/?ref=eda, SnapEDA_Link=https://www.snapeda.com/parts/PEC12R-2220F-S0024/Bourns/view-part/?ref=snap
SW1: library part CMP-1452-00013-1, "WS-TASV SMD Tact Switch 6X6 mm", Manufacturer="Wuerth Elektronik", ComponentLink1Description="Manufacturer URL", ComponentLink1URL=http://www.we-online.com, ComponentLink2Description=Datasheet, ComponentLink2URL=http://katalog.we-online.de/em/datasheet/4301x2.pdf, NoPins=04, PackageReference=430182043816, PartNumber=430182043816
U4: library part CMP-0048-00499-1, "32-bit Microcontroller with Audio and Graphics Interface, USB and Advanced Analog, 50 MHz, 33 I/O, PMP, -40 to 85 degC, 44-pin TQFP (PT44), Tray", Manufacturer=Microchip, ComponentLink1Description="Manufacturer URL", ComponentLink1URL=http://www.microchip.com, ComponentLink2Description=Datasheet, ComponentLink2URL=http://ww1.microchip.com/downloads/en/DeviceDoc/61168E.pdf, ComponentLink3Description="Package Specification", ComponentLink3URL=http://www.microchip.com/stellent/groups/techpub_sg/documents/packagingspec/en012702.pdf, ComponentLink4Description="Product URL", ComponentLink4URL=http://www.microchip.com/PIC32MX250F128D, DatasheetVersion="Rev. E", Mounting Technology="Surface Mount", PackageDescription="44-Lead Plastic Thin Quad Flatpack, 10 x 10 mm Body, 0.8 mm Pitch", PackageReference=TQFP-PT44, PackageVersion=C04-076B, PartNumber=PIC32MX250F128D-I/PT
U5 U6 U7: library part CMP-0015-00087-2, "Enhanced JFET Precision Dual Operational Amplifier, 10 to 30 V, 0 to 70 degC, 8-pin SOIC (D8), Green (RoHS & no Sb/Br)", Manufacturer="Texas Instruments", Rating=Military, Total Supply Voltage(Max)(+5V is 5, +/-5V is 10)=30, Total Supply Voltage(Min)(+5V is 5, +/-5V is 10)=10, CMRR(Min)(dB)=75, Code_JEDEC=MS-012, ComponentLink1Description="Manufacturer URL", ComponentLink1URL=http://www.ti.com/, ComponentLink2Description=Datasheet, ComponentLink2URL=http://www.ti.com/lit/ds/symlink/tl052a.pdf, ComponentLink3Description="Package Specification", ComponentLink3URL=http://www.ti.com/litv/pdf/msoi002j, DatasheetVersion=SLOS178A, Eco-Plan="Green (RoHS & no Sb/Br)", GBW(Typ)(MHz)=3, IIB(Max)(pA)=200, Iq per channel(Max)(mA)=2.8, Mounting Technology="Surface Mount", Number of Channels=2, Offset Drift(Typ)(uV/C)=6, PackageDescription="8-Pin Plastic Small Outline, Body 4.9 x 3.9 mm, Pitch 1.27 mm", PackageReference=D0008A, PackageVersion="4040047-3/M, 06/2011", PartNumber=TL052ACD, Slew Rate(Typ)(V/us)=20.7, Sub Family="General Purpose Amplifier, High Supply Voltage Amplifier (>=30V)", Vio (25C)(Max)(mV)=0.8, Vn at 1kHz(Typ)(nV/rtHz)=19
U8 U9: library part CMP-0246-00246-1, "500mA, 76V, High-Efficiency, MAXPower(TM) Step-Down DC-DC Converter, 3.3V output, 8-Pin SOIC, 0°C to +85°C", Code_IPC=SOIC127P600-8, Code_JEDEC=MS-012-AA, ComponentLink1Description="Manufacturer URL", ComponentLink1URL=http://www.maxim-ic.com, ComponentLink2Description=Datasheet, ComponentLink2URL=http://datasheets.maxim-ic.com/en/ds/MAX5033.pdf, ComponentLink3Description="Package Specification", ComponentLink3URL=http://pdfserv.maxim-ic.com/package_dwgs/21-0041.PDF, DatasheetVersion="Rev 5, May-2011", PackageDescription="8-Pin Small-Outline IC, Narrow (0.15in), 1.27 mm Pitch, SOIC (N)", PackageReference=S8-5, PackageVersion="revC, 2010"
U10: library part CMP-05690-000009-1, "IC I/O EXPANDER I2C 8B 16TSSOP", Case/Package=TSSOP, Frequency=400kHz, Max Operating Temperature=125°C, Min Operating Temperature=-40°C, Operating Supply Voltage=3.6V, Output Current=50mA, Package Quantity=2500, Power Dissipation=1.176W, Interface=I2C, Lead Free="Lead Free", Max Frequency=400kHz, Mount="Surface Mount", Number of I/Os=8, Number of Pins=16, Packaging="Tape and Reel", RoHS Compliant=Yes, Series=-
X1 X2 X3: library part Berg, "CONN HEADER VERT 1POS", Supplier="Stock ES"
X4 X8 X9 X10: "CONN HEADER VERT 2POS 2.54MM", Supplier=Mouser, Supplier Ref.=710-61300211121, Supplier unit price=0.119
Y1: library part CMP-1749-00001-1, "Resistance Weld SMD Crystal, 8 MHz, +/- 30 ppm, 12 pF, -20 to 70 degC, 2-Pin SMD, RoHS, Tape and Reel", Case\Package=SOT-553-6, Max Operating Temperature="150 degC", Max Supply Voltage="3.3 V", Max Supply Voltage (DC)="6 V", Min Operating Temperature="-55 degC", Min Supply Voltage="1.4 V", Min Supply Voltage (DC)="4 V", Output Current="3 mA", Package Quantity=1, ComponentLink1Description="Manufacturer URL", ComponentLink1URL=http://www.foxonline.com/, ComponentLink2Description=Datasheet, ComponentLink2URL=http://foxonline.com/pdfs/hc49sdlf.pdf, DatasheetVersion=Mar-15, Height="0.55 mm", Interface=I2C, Length="1.6 mm", Mount="Surface Mount", PackageDescription="2-Pin Surface Mount Device, Body 5 x 11.7 mm, Height 4.5 mm", PackageReference=FOX-FOXSDLF160-20, Packaging="Cut Tape", Pins=6, Radiation Hardening=No, REACH SVHC="No SVHC", RoHSCompliant=true, Weight="9.9E-05 oz", Width="1.2 mm"
L1 L2: Code_IEC=1005, Code_JEITA=0402, LatestRevisionDate=29-May-2009, LatestRevisionNote="IPC-7351 Footprint Added.", PackageDescription="Chip Inductor", PackageReference=0402-A, Published=8-Jun-2000, Publisher="Altium Limited"

## Free pads (board coordinates)
  round 1.524 hole 3.2: 2(4.5,4.5) 2(4.5,90.5) 2(150.5,4.5) 2(150.5,90.5)

## Via types
v1: diameter 0.65, hole 0.3, Top Layer to Bottom Layer, 146 vias

## Nets (pads, with @x,y where several pads share a name; then routed paths per layer and width w, separated by ;. In a path a pad name is that pad's centre, name@x,y a point inside that pad or via, vN(x,y) a via of type N, cw(c..) or ccw(c..) an arc to the next point about the centre after c; other vN are vias at no path point)
3.3Vcc: 3V3.1 C30.1 L2.2 R35.2 X9.2 | length 34.5
  Top Layer w0.5: L2.2 33.02,24.892 33.274,24.638 39.624,24.638 43.434,20.828 43.434,9.783 45.851,7.366 3V3.1 ; L2.2@33.06,24.638 33.274,24.424 C30.1 R35.2
3V3: B1.2 C11.1 C12.1 C13.1 C33.2 J1.2 P8.1 P9.1 P10.1 R3.2 R6.2 R7.2 R8.2 R10.2 R11.2 R12.2 R13.2 R14.2 U4.10 U4.28 U4.40 U10.16 X9.1 | length 297.1
  Top Layer w0.5: R12.2@41.656,83.82 45.093,80.383 45.093,34.321 44.45,33.678 44.45,24.638 ; X9.1 44.45,24.638 ; v1(49.022,20.066) 46.482,20.066 44.45,22.098 44.45,24.638 ; R3.2 56.67,17.636 v1(59.182,17.636) ; v1@59.182,17.664 60.314,17.664 J1.2 ; C11.1 C13.1 69.865,27.251 v1(69.865,28.702) ; v1(71.916,28.702) 74.016,26.602 U4.10 74.016,22.844 v1(76.032,20.828) 77.216,19.644 U4.28 v1(77.216,10.333) ; v1(81.216,19.9) 81.241,19.875 82.891,19.875 U4.40 86.31,19.85 86.36,19.9 v1(86.36,21.59) ; C33.2 85.048,28.083 85.048,28.918 v1@85.628,29.499 ; v1(85.657,29.528) U10.16 ; v1(110.49,18.542) R6.2 R7.2 R13.2 R14.2 116.686,13.104 117.159,13.577 117.159,13.677 122.29,18.808 R10.2 R11.2 R8.2 139.446,24.849 153.162,38.565 153.162,45.466 149.86,48.768 P8.1 152.146,54.182 152.146,64.262 ; P9.1 152.146,64.262 ; P10.1 152.146,74.422 152.146,64.262
  Bottom Layer w0.5: v1(49.022,20.066) 51.452,17.636 v1(59.182,17.636) ; J1.2 68.498,9.48 76.363,9.48 v1(77.216,10.333) ; B1.2 66.802,30.48 68.58,28.702 v1(69.865,28.702) v1(71.916,28.702) ; v1(76.032,20.828) 80.288,20.828 v1(81.216,19.9) ; v1(85.657,29.528) 84.836,28.706 84.836,23.114 v1(86.36,21.59) 87.376,21.59 90.424,18.542 v1(110.49,18.542)
5V: D4.2 P4.1 Q1.3 R9.1 R41.2 X8.1 | length 196.8
  Top Layer w0.5: R9.1 Q1.3 20.574,90.424 23.114,92.964 75.438,92.964 P4.1 79.906,88.496 D4.2 ; v1(46.99,21.45) 46.99,28.956 49.022,30.988 v1(53.594,30.988) ; v1(64.516,30.988) v1(69.088,30.988) ; R41.2 v1@86.868,39.878 ; v1(86.868,39.814) 87.82,39.814 89.662,41.656 v1(89.662,42.672)
  Bottom Layer w0.5: X8.1 43.663,9.906 46.99,13.233 v1(46.99,21.45) ; v1(53.594,30.988) v1(64.516,30.988) ; v1(69.088,30.988) 80.518,30.988 86.868,37.338 v1(86.868,39.814) ; P4.1 87.376,81.026 87.376,44.958 v1(89.662,42.672)
5Vcc: 5V.1 C29.1 L1.2 R34.2 X8.2 | length 24.3
  Top Layer w0.5: L1.2 L1.2@34.306,10.825 ; X8.2 35.225,9.906 L1.2@34.306,10.825 ; 5V.1 34.86,3.556 34.306,4.11 L1.2@34.306,10.825
+15V: +15V.1 C15.2 C19.2 C22.2 C25.1 C26.1 P1.1 R32.2 R33.2 U5.8 U6.8 U7.8 U8.7 U9.7 X4.1 | length 337.5
  Top Layer w0.5: v1(7.874,25.295) C26.1 11.638,25.295 R33.2 16.811,25.341 20.262,21.89 U9.7 ; C25.1 R32.2 14.051,9.652 v1(16.256,9.652) ; v1(22.098,7.666) U8.7 ; v1(91.891,21.59) 91.948,21.533 +15V.1 X4.1 ; U5.8 113.792,70.75 ; U7.8 114.554,25.215 ; C15.2 113.854,70.812 113.792,70.75 ; v1(114.554,22.606) 114.554,25.215 ; v1(134.62,37.338) 145.085,37.338 146.246,38.499 146.246,38.816 C19.2 v1(147.828,39.116) ; v1(146.812,45.085) U6.8 ; 113.792,70.75 126.746,57.796 v1(126.746,37.338) 116.344,26.936 C22.2 114.554,25.215
  Bottom Layer w0.5: v1(7.874,25.295) 7.874,16.51 14.732,9.652 v1(16.256,9.652) 20.112,9.652 v1(22.098,7.666) 27.732,2.032 86.36,2.032 89.408,5.08 89.408,10.333 X4.1 ; P1.1 66.136,89.82 67.66,89.82 69.596,87.884 69.596,60.706 91.891,38.411 v1(91.891,21.59) 113.538,21.59 v1(114.554,22.606) ; v1(126.746,37.338) v1(134.62,37.338) ; v1(146.812,45.085) 146.812,42.672 147.828,41.656 v1(147.828,39.116)
+15Vcc: X1.1 X4.2 | length 7.6
  Top Layer w0.5: X1.1 X4.2
-15V: -15V.1 C16.2 C21.2 C24.2 U5.4 U6.4 U7.4 X10.1 | length 114.3
  Top Layer w0.5: X10.1 -15V.1 v1(101.346,23.114) ; v1(102.616,74.398) C16.2 106.656,74.398 107.25,74.992 U5.4 ; C24.2 105.733,28.505 107.499,28.505 108.331,29.337 U7.4 v1(108.331,32.258) ; v1(131.826,40.896) C21.2 141.732,40.896 142.111,41.275 U6.4
  Bottom Layer w0.5: v1(101.346,23.114) 101.346,26.354 107.25,32.258 v1(108.331,32.258) 108.681,32.608 108.681,40.894 ; v1(102.616,74.398) 106.172,70.842 106.172,43.403 108.681,40.894 ; v1(131.826,40.896) 131.824,40.894 108.681,40.894
-15Vcc: X3.1 X10.2 | length 7.6
  Top Layer w0.5: X3.1 X10.2
BTN1: P2.2 R6.1 U4.2 | length 46.5
  Top Layer w0.254: U4.2 80.416,25.417 80.977,25.978 100.173,25.978 105.733,20.418 105.733,12.251 106.68,11.304 ; P2.2 106.68,11.304 ; R6.1 106.68,11.304
BTN2: P3.2 R7.1 U4.3 | length 51.6
  Top Layer w0.254: U4.3 79.616,25.417 80.582,26.383 100.444,26.383 106.426,20.401 v1(106.426,12.446) ; P3.2 111.335,6.616 111.69,6.971 111.734,6.971 112.522,7.759 R7.1
  Bottom Layer w0.254: v1(106.426,12.446) 110.998,7.874 P3.2
BTN3: P5.2 R13.1 U4.4 | length 55.5
  Top Layer w0.254: U4.4 78.816,25.417 80.187,26.788 100.72,26.788 107.499,20.009 v1(107.499,12.446) ; R13.1 114.554,7.378 P5.2
  Bottom Layer w0.254: v1(107.499,12.446) 113.329,6.616 P5.2
BTN4: P6.2 R14.1 | length 6
  Top Layer w0.254: R14.1@116.686,11.304 116.686,9.818 P6.2
Capt_Temp1: P8.2 U4.21 | length 107.1
  Top Layer w0.254: U4.21 71.528,15.838 73.164,15.838 v1(73.177,15.825) ; v1(135.636,25.654) v1(138.684,25.654)
  Bottom Layer w0.254: v1(73.177,15.825) 125.807,15.825 v1(135.636,25.654) ; v1(138.684,25.654) 138.684,45.466 149.86,56.642 P8.2
Capt_Temp2: P9.2 U4.22 | length 121.5
  Top Layer w0.254: v1(71.516,13.934) U4.22 ; v1(135.636,24.384) v1(137.668,24.384)
  Bottom Layer w0.254: v1(71.516,13.934) 71.592,14.01 72.214,14.01 73.624,15.42 126.672,15.42 v1(135.636,24.384) ; v1(137.668,24.384) 137.668,57.07 P9.2
Capt_Temp3: P10.2 U4.23 | length 134.4
  Top Layer w0.254: v1(73.216,10.936) U4.23
  Bottom Layer w0.254: v1(73.216,10.936) 85.104,10.936 88.382,14.214 126.736,14.214 136.652,24.13 136.652,68.5 P10.2
GND: B1.1 C1.1 C4.1 C6.1 C8.2 C10.1 C12.2 C15.1 C16.1 C19.1 C21.1 C22.1 C24.1 C25.2 C26.2 C29.2 C30.2 C31.2 C32.2 C33.1 D1.1 D2.1 D5.1 D6.1 GND.1 J1.3 P2.1 P3.1 P5.1 P6.1 Q3.3 Q4.3 Q5.3 R12.1 R16.2 R17.1 R18.1 R19.1 R36.1 R37.1 R38.1 R39.1 S1.2 S1.C SW1.1 SW1.3 U4.6 U4.16 U4.29 U4.39 U5.3 U5.5 U6.3 U6.5 U7.3 U8.3 U8.6 U9.3 U9.6 U10.1 U10.2 U10.3 U10.8 X2.1 | length 0.1
  Top Layer w0.254: R17.1 R17.1@71.358,85.024
  other v1: 10,10 50,10 100,10 120,10 35,20 45,20 55,20 65,20 75,20 95,20 105,20 115,20 125,20 135,20 145,20 10,30 20,30 30,30 40,30 50,30 100,30 130,30 140,30 15,40 25,40 35,40 75,40 95,40 105,40 115,40 125,40 135,40 10,50 20,50 30,50 40,50 50,50 60,50 70,50 90,50 100,50 110,50 120,50 130,50 140,50 15,60 25,60 35,60 65,60 75,60 95,60 115,60 145,60 107.25,68.326 10,70 20,70 30,70 40,70 50,70 60,70 80,70 90,70 100,70 120,70 130,70 140,70 15,80 25,80 35,80 55,80 65,80 75,80 85,80 95,80 105,80 115,80 125,80 145,80
LCD_BL: R15.1 U4.14 | length 83.8
  Top Layer w0.254: R15.1 36.576,84.174 37.049,84.647 37.149,84.647 37.592,85.09 41.91,85.09 47.826,79.174 47.901,79.099 55.372,71.628 55.372,34.024 67.946,21.45 U4.14
LCD_DB4: B1.11 U4.41 | length 45.7
  Top Layer w0.254: v1(80.01,22.86) 80.01,22.125 81.485,20.65 U4.41
  Bottom Layer w0.254: B1.11 56.447,22.293 73.855,22.293 74.422,22.86 v1(80.01,22.86)
LCD_DB5: B1.12 U4.43 | length 47.2
  Top Layer w0.254: v1(81.216,22.25) U4.43
  Bottom Layer w0.254: B1.12 41.402,34.544 54.102,21.844 74.016,21.844 74.422,22.25 v1(81.216,22.25)
LCD_DB6: B1.13 U4.37 | length 51.2
  Top Layer w0.254: v1(79.248,19.05) 80.848,17.45 U4.37
  Bottom Layer w0.254: B1.13 54.61,19.05 v1(79.248,19.05)
LCD_DB7: B1.14 U4.38 | length 53.5
  Top Layer w0.254: v1(81.107,18.25) U4.38
  Bottom Layer w0.254: B1.14 52.881,18.239 77.994,18.239 78.005,18.25 v1(81.107,18.25)
LCD_E: B1.6 U4.11 | length 21.6
  Top Layer w0.254: B1.6 61.827,29.613 69.86,29.613 73.216,26.257 U4.11
LCD_RS: B1.4 U4.8 | length 19.3
  Top Layer w0.254: B1.4 63.754,32.766 69.745,32.766 75.616,26.895 U4.8
LCD_RW: B1.5 U4.9 | length 21.1
  Top Layer w0.254: B1.5 61.722,32.258 69.596,32.258 74.816,27.038 U4.9
LedDebug: Debug.1 R1.2 U4.33 | length 35.6
  Top Layer w0.254: R1.2 56.954,24.834 58.42,23.368 Debug.1 60.452,21.158 62.076,19.534 63.664,19.534 v1(66.548,16.65) ; U4.33 82.147,13.35 82.296,13.201 v1(82.296,12.446)
  Bottom Layer w0.254: v1(66.548,16.65) 70.752,12.446 v1(82.296,12.446)
NetB1_3: B1.3 R12.3 | length 63.5
  Top Layer w0.254: R12.3@39.116,86.36 41.656,86.36 64.262,63.754 B1.3
NetB1_15: B1.15 Q2.1 | length 54.2
  Top Layer w0.254: Q2.1 25.842,42.738 B1.15
NetB1_16: B1.16 Q4.1 | length 51.6
  Top Layer w0.254: v1(30.226,81.534) Q4.1
  Bottom Layer w0.254: v1(30.226,81.534) 31.242,80.518 B1.16 B1.16@31.369,34.925
NetC1_2: C1.2 U4.30 Y1.1 | length 14.9
  Top Layer w0.254: C1.2 72.898,7.798 Y1.1 73.233,8.133 77.796,8.133 78.816,9.153 U4.30
NetC4_2: C4.2 U4.31 Y1.2 | length 12.1
  Top Layer w0.254: U4.31 79.616,9.162 79.927,8.851 79.927,8.823 80.8,7.95 Y1.2 82.296,7.696 C4.2
NetC6_2: C6.2 U4.7 | length 3.6
  Top Layer w0.254: C6.2 76.416,27.81 U4.7
NetC8_1: C8.1 R3.1 R4.1 SW1.2 SW1.4 | length 17.4
  Top Layer w0.254: R4.1 R3.1 56.642,13.474 C8.1 56.78,13.312 58.316,13.312 59.654,11.974 59.654,10.704 SW1.4 SW1.2
NetC10_2: C10.2 U4.17 | length 4.6
  Top Layer w0.254: C10.2 68.82,18.034 69.836,19.05 U4.17
NetC11_2: C11.2 C13.2 | length 1.8
  Top Layer w0.254: C11.2 C13.2
NetC17_1: C17.1 R23.2 R27.1 U5.7 | length 27.2
  Top Layer w0.254: U5.7 109.79,62.422 113.792,58.42 ; R23.2 C17.1 113.792,58.42 ; R27.1 113.792,58.42
NetC17_2: C17.2 R23.1 R26.2 U5.6 | length 25.8
  Top Layer w0.254: R26.2 103.57,58.166 103.632,58.228 ; R23.1 C17.2 103.632,58.228 ; U5.6 108.52,63.117 103.632,58.228
NetC23_1: C23.1 R30.1 | length 13
  Top Layer w0.254: R30.1 97.028,35.56 C23.1
NetC23_2: C23.2 ERR.1 R21.1 R26.1 R41.1 U10.4 | length 61.6
  Top Layer w0.254: U10.4 83.707,39.737 R41.1 83.566,41.378 85.876,43.688 90.62,43.688 ; ERR.1 R26.1 ; C23.2 90.62,35.618 90.62,43.688 ; R21.1 90.836,77.566 90.836,58.324 R26.1 ; 90.62,43.688 90.62,58.108 R26.1
NetC27_1: C27.1 U8.1 | length 8.1
  Top Layer w0.254: U8.1 21.658,8.936 23.158,10.436 C27.1
NetC27_2: C27.2 D5.2 L1.1 R34.1 R38.2 U8.4 U8.8 | length 28.9
  Top Layer w0.254: U8.4 21.498,5.126 23.17,3.454 27.178,3.454 ; U8.8 C27.2 ; L1.1 30.44,9.884 29.492,8.936 C27.2 ; R34.1 R38.2 28.6,2.032 27.178,3.454 ; 27.178,3.454 D5.2 C27.2
NetC28_1: C28.1 U9.1 | length 12.3
  Top Layer w0.254: v1(14.986,23.16) U9.1 ; v1(22.86,24.66) C28.1
  Bottom Layer w0.254: v1(14.986,23.16) 21.36,23.16 v1(22.86,24.66)
NetC28_2: C28.2 D6.2 L2.1 R35.1 R39.2 U9.4 U9.8 | length 33.3
  Top Layer w0.254: U9.4 18.266,19.35 21.498,16.118 25.062,16.118 ; U9.8 C28.2 ; L2.1 28.956,24.108 28.008,23.16 C28.2 ; R35.1 R39.2 25.062,16.118 ; C28.2 25.062,22.867 D6.2 25.062,16.118
NetC31_1: C31.1 U8.2 | length 4.3
  Top Layer w0.254: C31.1 17.337,5.842 18.832,7.337 18.832,7.506 18.992,7.666 U8.2
NetC32_1: C32.1 U9.2 | length 4
  Top Layer w0.254: C32.1 14.695,20.481 16.104,21.89 U9.2
NetD1_2: D1.2 R1.1 | length 3.3
  Top Layer w0.254: D1.2 R1.1
NetD2_2: D2.2 R2.1 | length 3.3
  Top Layer w0.254: D2.2 R2.1
NetD4_1: D4.1 P4.2 Q3.1 | length 11.3
  Top Layer w0.254: P4.2 73.531,89.871 73.531,88.521 76.2,85.852 Q3.1 78.259,84.074 79.529,82.804 79.844,82.804 D4.1
  Bottom Layer w0.254: P4.2@73.406,89.836 P4.2
NetP1_2: P1.2 Q5.1 | length 8
  Top Layer w0.254: P1.2 61.468,89.916 66.294,85.09 Q5.1
NetQ1_1: Q1.1 Q2.2 R16.1 | length 10.8
  Top Layer w0.254: Q1.1 22.207,89.009 22.606,89.408 23.942,89.408 ; Q2.2 23.942,89.408 ; R16.1 23.942,89.408
NetQ1_2: Q1.2 Q2.3 R9.2 | length 13.5
  Top Layer w0.254: Q1.2 19.624,86.732 18.542,85.65 18.542,83.058 19.05,82.55 R9.2 24.26,82.55 24.892,83.182 Q2.3
NetQ4_2: Q4.2 R15.2 R19.2 | length 7.1
  Top Layer w0.254: Q4.2 31.176,83.673 31.349,83.846 34.548,83.846 R15.2 34.776,87.216 R19.2
NetR2_2: R2.2 U4.15 | length 17.9
  Top Layer w0.254: R2.2 59.806,28.702 67.858,20.65 U4.15
NetR20_1: R20.1 R21.2 U5.2 | length 18.7
  Top Layer w0.254: R21.2 103.632,77.724 ; R20.1 103.694,77.786 103.632,77.724 ; U5.2 109.79,76.625 108.691,77.724 103.632,77.724
NetR20_2: R20.2 R22.1 U5.1 | length 17.2
  Top Layer w0.254: U5.1 112.076,76.2 113.854,77.978 ; R20.2 113.854,77.978 ; R22.1 113.854,77.978
NetR22_2: D.1 I.1 P.1 R22.2 R24.1 R27.2 R31.2 U6.6 | length 89.6
  Top Layer w0.254: I.1 R27.2 ; P.1 R22.2 128.559,77.759 128.559,77.291 128.524,77.256 R27.2 ; U6.6 150.727,42.545 R24.1 150.876,38.596 148.602,36.322 143.256,36.322 138.938,32.004 D.1 R31.2 R27.2
NetR24_2: R24.2 R28.1 U6.7 | length 16.4
  Top Layer w0.254: R28.1 148.082,34.798 152.4,39.116 152.4,43.561 151.808,44.153 150.919,44.153 R24.2 150.495,43.815 U6.7
NetR25_1: R25.1 R28.2 U6.2 | length 16.5
  Top Layer w0.254: R25.1 141.741,44.185 142.111,43.815 U6.2 v1(144.78,43.815) ; R28.2 144.78,34.776 v1(144.78,33.274)
  Bottom Layer w0.254: v1(144.78,33.274) v1(144.78,43.815)
NetR25_2: COMM.1 R25.2 U6.1 | length 11.9
  Top Layer w0.254: R25.2 143.06,45.985 143.071,45.974 ; COMM.1 143.071,54.287 143.071,45.974 ; U6.1 143.071,45.974
NetR29_1: R29.1 R30.2 U7.2 | length 19.2
  Top Layer w0.254: R30.2 100.803,29.175 100.803,30.445 104.14,33.782 ; R29.1 104.14,33.782 ; U7.2 110.871,31.623 108.712,33.782 104.14,33.782
NetR29_2: R29.2 R31.1 U7.1 | length 12.9
  Top Layer w0.254: U7.1 112.961,30.665 114.3,32.004 ; R29.2 114.3,32.004 ; R31.1 114.3,32.004
NetR32_1: R32.1 R36.2 U8.5 | length 17
  Top Layer w0.254: v1(12.468,6.015) R36.2 R32.1 ; U8.5 24.521,5.103 v1(24.521,4.215)
  Bottom Layer w0.254: v1(12.468,6.015) 22.721,6.015 v1(24.521,4.215)
NetR33_1: R33.1 R37.2 U9.5 | length 17.7
  Top Layer w0.254: v1(10.414,20.631) R37.2 R33.1 ; U9.5 21.844,19.21 v1(21.844,18.288)
  Bottom Layer w0.254: v1(10.414,20.631) 12.757,18.288 v1(21.844,18.288)
NetU4_1: U4.1 U10.15 | length 11.5
  Top Layer w0.254: U4.1 81.3,24.834 v1(82.232,24.834) ; U10.15 v1(85.007,32.608)
  Bottom Layer w0.254: v1(82.232,24.834) 82.296,24.898 82.296,27.341 85.007,30.052 v1(85.007,32.608)
NetU4_12: U4.12 U10.13 | length 17.1
  Top Layer w0.254: U4.12 v1(71.516,24.13) ; v1(80.01,29.464) 83.558,29.464 83.707,29.613 U10.13
  Bottom Layer w0.254: v1(71.516,24.13) 76.914,29.528 79.947,29.528 v1(80.01,29.464)
NetU4_44: U4.44 U10.14 | length 8.6
  Top Layer w0.254: U4.44 82.916,24.586 83.057,24.727 v1(83.057,24.834) ; v1(83.312,27.391) 83.312,28.307 84.357,29.352 U10.14
  Bottom Layer w0.254: v1(83.057,24.834) 83.057,27.044 83.312,27.299 v1(83.312,27.391)
PGEC: J1.5 U4.20 | length 14.5
  Top Layer w0.254: J1.5 68.154,9.48 68.154,14.56 70.244,16.65 U4.20
PGED: J1.4 U4.19 | length 12.8
  Top Layer w0.254: J1.4 67.564,11.43 67.564,14.872 70.142,17.45 U4.19
POT_A: R11.1 S1.A TP2.1 U4.27 | length 74.9
  Top Layer w0.254: v1(76.416,11.684) U4.27 ; v1(122.682,14.817) 125.815,11.684 128.524,11.684 ; S1.A 128.524,4.734 128.524,11.684 ; R11.1 TP2.1 133.096,12.7 132.08,11.684 128.524,11.684
  Bottom Layer w0.254: v1(76.416,11.684) 85.279,11.684 88.422,14.827 122.672,14.827 v1(122.682,14.817)
POT_AB: R8.1 S1.1 TP1.1 | length 16.2
  Top Layer w0.254: S1.1 130.244,5.718 131.956,5.718 139.446,13.208 TP1.1 R8.1
POT_B: R10.1 S1.B TP3.1 U4.36 | length 65.3
  Top Layer w0.254: U4.36 v1(85.007,16.65) ; v1(122.682,17.008) R10.1 126.854,16.9 126.854,14.714 TP3.1 126.854,14.498 v1(126.854,12.7)
  Bottom Layer w0.254: v1(85.007,16.65) 85.365,17.008 v1(122.682,17.008) ; v1(126.854,12.7) 130.205,9.349 134.669,9.349 136.652,7.366 136.652,4.626 S1.B
PWM1: Q5.2 R18.2 U4.24 | length 82.5
  Top Layer w0.254: R18.2 60.502,83.378 Q5.2 64.077,83.345 66.261,83.345 v1(66.294,83.312) ; v1(73.216,23.114) 73.216,21.602 74.016,20.802 U4.24
  Bottom Layer w0.254: v1(66.294,83.312) 68.645,80.961 68.645,61.025 65.532,57.912 65.532,29.261 71.679,23.114 v1(73.216,23.114)
PWM2: Q3.2 R17.2 U4.34 | length 83
  Top Layer w0.254: R17.2 71.458,83.124 Q3.2 73.95,81.752 74.898,80.804 77.692,80.804 82.232,76.264 v1(82.232,46.228) ; U4.34 86.424,15.05 88.646,17.272 v1(88.646,22.352)
  Bottom Layer w0.254: v1(82.232,46.228) 88.646,39.814 v1(88.646,22.352)
Reset: J1.1 R4.2 U4.18 | length 20.3
  Top Layer w0.254: R4.2 54.61,18.704 54.956,19.05 61.468,19.05 J1.1 67.894,16.002 70.142,18.25 U4.18
pads on no net: B1.7 B1.8 B1.9 B1.10 B1.MH1 B1.MH2 B1.MH3 B1.MH4 J1.6 S1.S1 S1.S2 U4.5 U4.13 U4.25 U4.26 U4.32 U4.35 U4.42 U7.5 U7.6 U7.7 U10.5 U10.6 U10.7 U10.9 U10.10 U10.11 U10.12

## Polygon pours and split planes (outlines as drawn)
GND on Top Layer "GND_L01_P005" (solid, pour order 5): -0.024,94.912 0,94.888 0,0 155.194,0 154.94,0.254 154.94,95.25 0.254,95.25 0,94.996
GND on Bottom Layer "GND_L02_P006" (solid, pour order 6): 0,0 155.194,0 154.94,0.254 154.94,94.996 0,94.996 0,94.742 0,94.996 0,94.742

## Keep-outs
Keep-Out Layer:
  circle w2: c4.5,90.5 r3
  circle w2: c4.5,4.5 r3
  circle w2: c150.5,4.5 r3
  circle w2: c150.5,90.5 r3

## Silkscreen, mask and mechanical layers (free items; w line width, h text height)
Top Overlay:
  lines w0.254: 87.376,22.352 138.43,22.352 138.43,42.672 87.376,42.672 87.376,22.352 ; 87.376,45.72 138.43,45.72 138.43,65.786 87.376,65.786 87.376,45.72 ; 87.438,69.088 138.43,69.088 138.43,91.694 87.438,91.694 87.438,69.088
  text "Regulation proportionnelle" at 87.63,92.602 h1.2
  text "Regulation integrale" at 87.884,66.694 h1.2
  text "Regulation derivee" at 87.884,43.596 h1.2
Board Outline (ES):
  the board outline again, w0.254

## Dimensions
0.056,90.729 to 154.984,90.482 on Top Dims
4.332,95.004 to 4.498,0.072 on Top Dims